# Altium PCB ESE6710 Final Project.PcbDoc
Units mil, origin at the board's own origin, x right, y up, seen from the top; angles counter-clockwise.
Board outline 2951 x 2451 mil, 2 copper layers (Top Layer, Bottom Layer), stack 61.756 mil thick; 34 components, 12 nets, 85 pads, 279 vias.
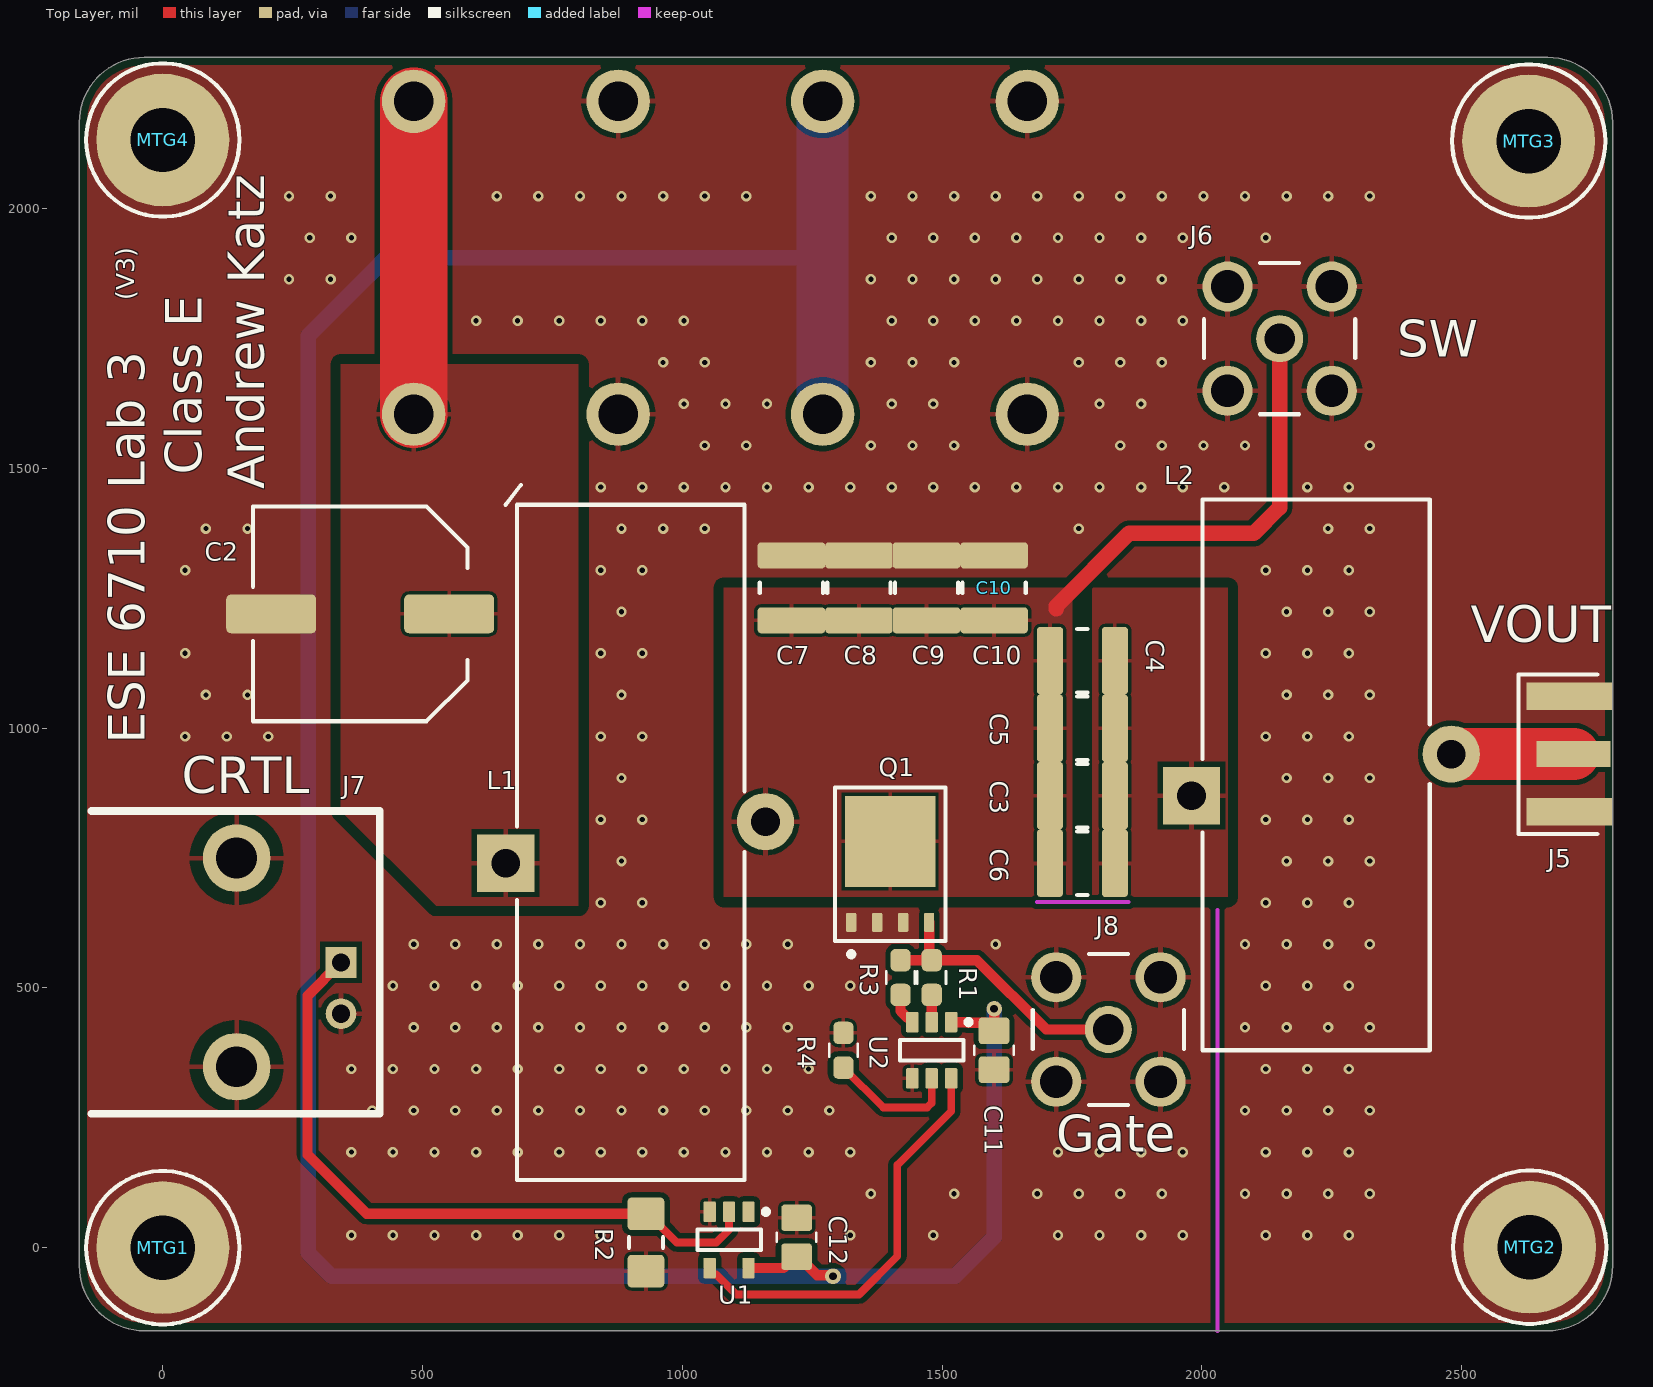
[diagram p0: Top Layer view]
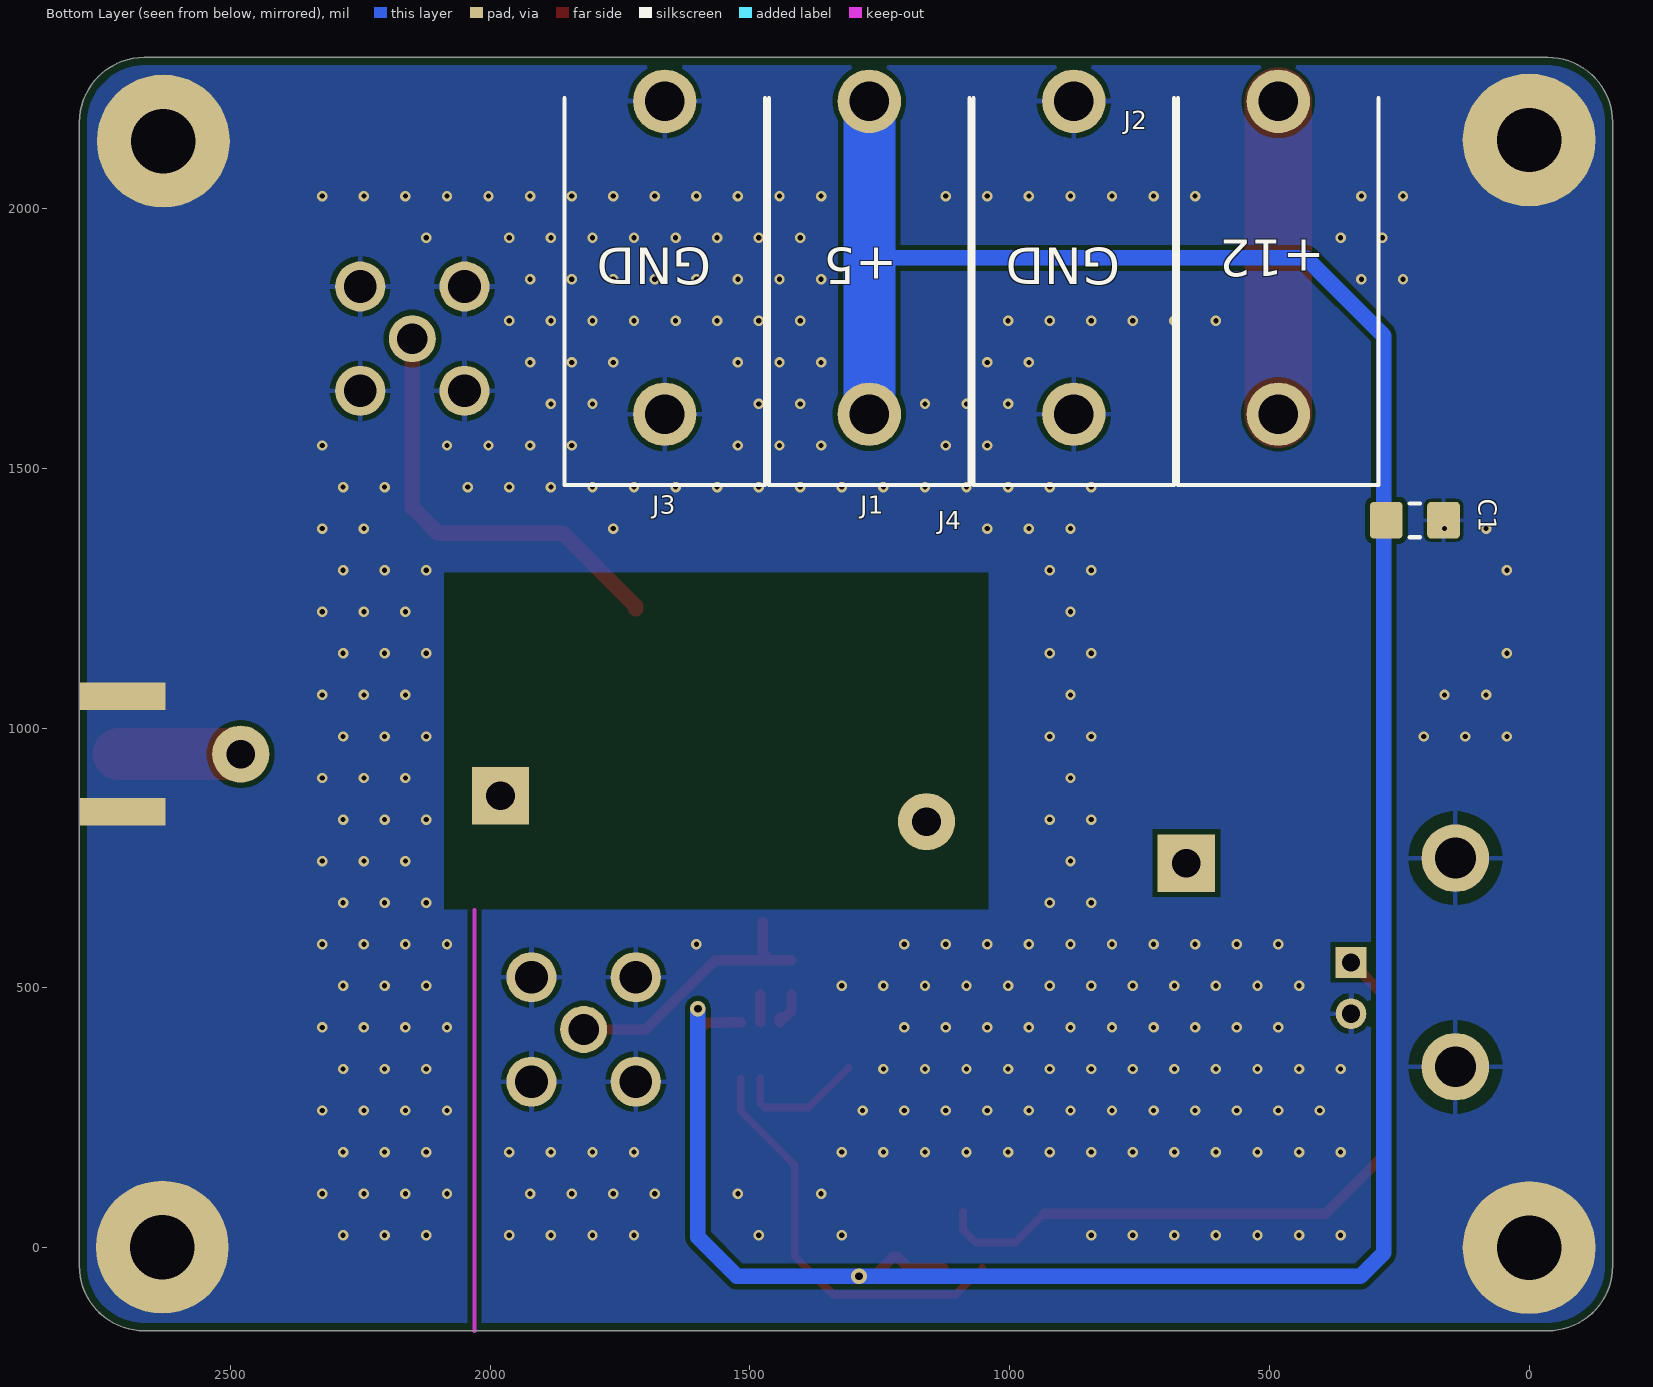
[diagram p1: Bottom Layer view, seen from below]
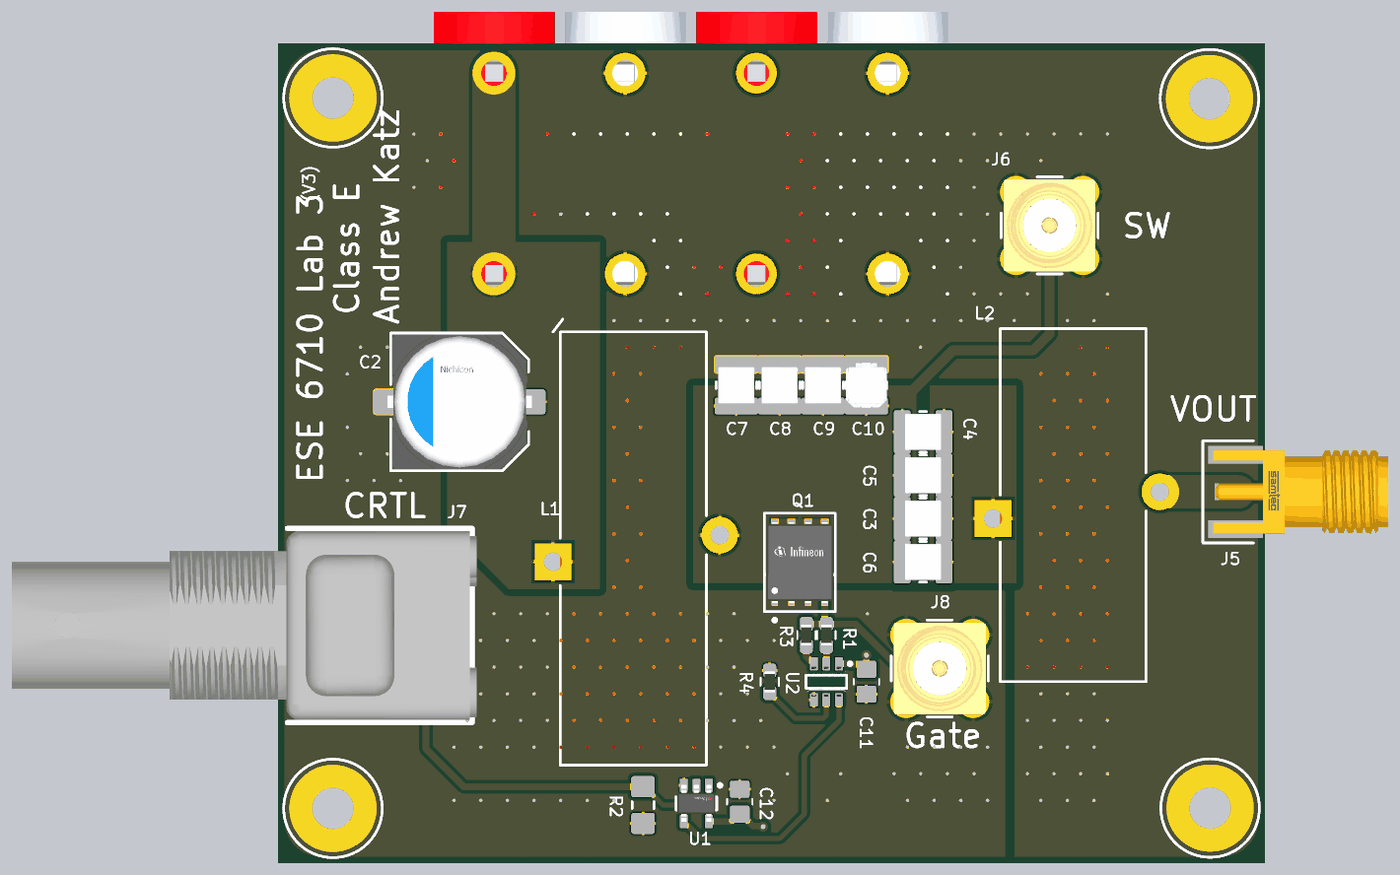
[diagram p2: 3D render of the assembled board from above, using the file's embedded part models]
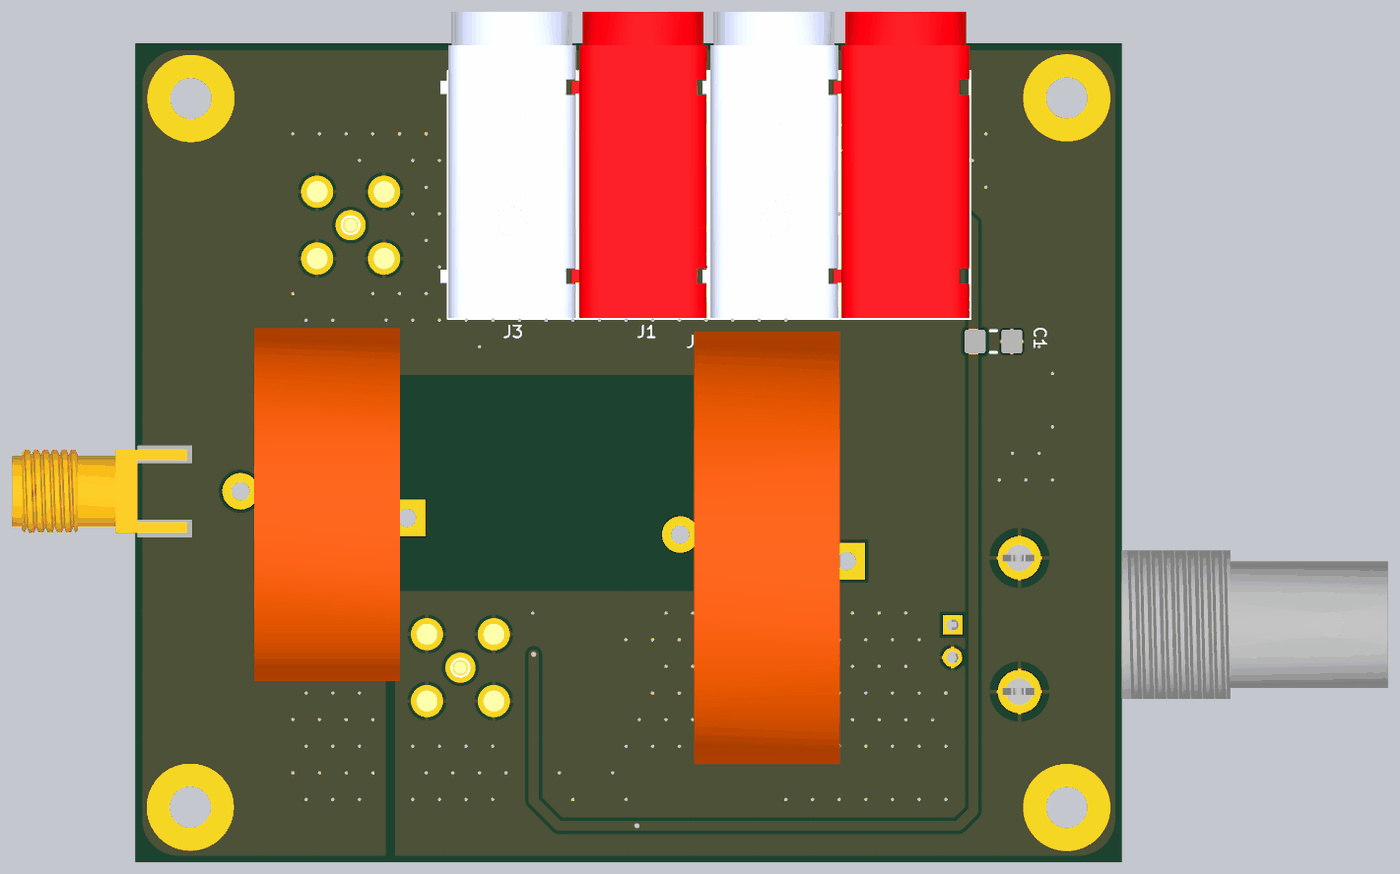
[diagram p3: 3D render of the assembled board from below, using the file's embedded part models]

## Layer stack, top to bottom
Top Solder: solder mask 1, PSR-4000BN, Dk 4.5
Top Layer: signal copper 1.378
Dielectric 1: core 59, Kingboard KB6167F, Dk 4.5
Bottom Layer: signal copper 1.378
Bottom Solder: solder mask 1, PSR-4000BN, Dk 4.5

## Board outline
-160.5,-35 -160.5,2166 cw(c-35.5,2166) -35.5,2291 2665.5,2291 cw(c2665.5,2166) 2790.5,2166 2790.5,-35 cw(c2665.5,-35) 2665.5,-160 -35.5,-160 cw(c-35.5,-35)

## Design rules (kind name [scope] priority, off if disabled: settings)
AcuteAngle [All] p1: minimum=6.00000000000000E+0001 checktracksonly=FALSE
BoardOutlineClearance [Not (OnSilkscreen Or HasFootprint('FP-SMA-J-P-H-ST-EM1-MFG'))] p1: gap=15 ignorepadtopadclearanceinfootprint=FALSE
Clearance [All] p1: gap=10 ignorepadtopadclearanceinfootprint=FALSE except(6: Arc-Text Track-Text SMDPad-Text THPad-Text Via-Text Fill-Text Poly-Text Region-Text Text-Text; 8: Arc-Arc Arc-Track Arc-SMDPad Arc-THPad Track-Track Track-SMDPad Track-THPad SMDPad-SMDPad; 15: THPad-THPad; 20: Via-Via Fill-Fill Fill-Poly Fill-Region Poly-Poly Poly-Region Region-Region; 30: THPad-Via)
ComponentClearance [All] p1: gap=1 collisioncheckmode=3 verticalgap=1 showdistances=FALSE
DiffPairsRouting [All] p1: maxlimit=393.7 minlimit=6 mostfreqgap=8 toplayer_minwidth=6 toplayer_maxwidth=15 toplayer_prefwidth=8 bottomlayer_minwidth=6 bottomlayer_maxwidth=15 bottomlayer_prefwidth=8 maxuncoupledlength=500
Height [All] p1 off: minheight=0 maxheight=1000 prefheight=500
HoleSize SlotSize [(HoleType = 'Slot')] p1: absolutevalues=TRUE maxlimit=265 minlimit=20 maxpercent=80.000 minpercent=20.000
HoleSize [All] p2: absolutevalues=TRUE maxlimit=265 minlimit=10 maxpercent=80.000 minpercent=20.000
HoleToHoleClearance [All] p1: gap=10 allowstackedmicrovias=FALSE
MinimumAnnularRing [All] p1: minimumring=5
MinimumSolderMaskSliver [All] p1: minsoldermaskwidth=0
PlaneClearance [All] p1: clearance=10
PlaneConnect [All] p1: planeconnectstyle=Direct reliefexpansion=16 reliefentries=4 reliefconductorwidth=6 reliefairgap=6
PolygonConnect PolygonConnect_Direct [InPolygonClass('DirConn')] p1: connectstyle=Direct reliefconductorwidth=10 reliefentries=4 polygonreliefangle="90 Angle" airgapwidth=10
PolygonConnect [All] p2: thpad.connectstyle=Relief thpad.reliefconductorwidth=10 thpad.reliefentries=4 thpad.polygonreliefangle="90 Angle" thpad.airgapwidth=10 smdpad.connectstyle=Relief smdpad.reliefconductorwidth=8 smdpad.reliefentries=4 smdpad.polygonreliefangle="90 Angle" smdpad.airgapwidth=6 via.connectstyle=Direct via.reliefconductorwidth=8 via.reliefentries=4 via.polygonreliefangle="90 Angle" via.airgapwidth=6
RoutingCorners [All] p1: cornerstyle=45-Degree minsetback=49.21 maxsetback=49.21
RoutingVias [All] p1: holewidth=15 width=30 viastyle="Through Hole" minholewidth=13 minwidth=27 maxholewidth=100 maxwidth=114
SMDNeckDown [All] p1 off: percent=100.000
SilkToSilkClearance SilkTextToSilk [IsText AND OnSilkscreen] p1: silktosilkclearance=5
SilkToSilkClearance [All] p2: silktosilkclearance=0
SilkToSolderMaskClearance [IsPad] p1: minsilkscreentomaskgap=6 clearancetoexposedcopper=TRUE
SolderMaskExpansion "Tent Vias" [IsVia] p1: expansion=4 istentingtop=TRUE
SolderMaskExpansion [All] p2: expansion=2.95 istentingtop=FALSE
SupplyNets "Schematic Supply Nets_2" [InNet('GND')] p1: voltage=0.000
SupplyNets "Schematic Supply Nets_1" [InNet('+12')] p2: voltage=0.000
SupplyNets "Schematic Supply Nets" [InNet('+5')] p3: voltage=0.000
Width [All] p1: maxlimit=400 minlimit=6 preferedwidth=8
19 further rules are at their usual default settings.

## Classes and differential pairs
polygon class DirConn: LC_L01_P002 SW_L01_P001

## Components (designator, comment, footprint, x,y, rotation, side; value= is the part's Value field where it differs from the comment)
C1 "CAP 1206 10UF 50V 10% X5R" 1206_CAP 220,1400 r180 bottom value=10µF
C2 "PCR1J101MCL1GS" CAPAE_10X12.2_D10.5_NIC 380,1220 r0 top value=100µF
C3 "800B102KT50XT" "CAP_1111_ATC 800B" 1770,870 r0 top value=1nF
C4 "800B1R0BT500XT1K" "CAP_1111_ATC 800B" 1770,1130 r0 top value=1pF
C5 "800B221JT200XT1K" "CAP_1111_ATC 800B" 1770,1000 r0 top value=220pF
C6 "800B1R0BT500XT1K" "CAP_1111_ATC 800B" 1770,740 r0 top value=1pF
C7 "800B221JT200XT1K" "CAP_1111_ATC 800B" 1210,1270 r270 top value=220pF
C8 "800B2R0BT500XT1K" "CAP_1111_ATC 800B" 1340,1270 r270 top value=2pF
C9 "800B2R0BT500XT1K" "CAP_1111_ATC 800B" 1470,1270 r270 top value=2pF
C10 "JR500" JR500-Footprint-1 1600,1270 r90 top
C10 "800B2R0BT500XT1K" "CAP_1111_ATC 800B" 1600,1270 r90 top value=2pF
C11 "CAP 0805 1UF 50V 10% X7R" 0805_CAP 1600,380 r90 top value=1µF
C12 "CAP 0805 0.1UF 50V 10% X7R" 0805_CAP 1220,20 r90 top value=100nF
J1 "571-0500" 571-0500-Footprint-1 1270.18,1905.35 r90 bottom
J2 "571-0500" 571-0500-Footprint-1 482.78,1905.35 r90 bottom
J3 "571-0100" 571-0100-Footprint-1 1663.88,1905.35 r90 bottom
J4 "571-0100" 571-0100-Footprint-1 876.48,1905.35 r90 bottom
J5 "CON-SMA-EDGE-S" FP-SMA-J-P-H-ST-EM1-MFG 2790,950 r90 top value=SMA
J6 "RF2-04A-T-00-50-G" FP-RF2-04A-T-00-50-G-MFG 2149.61,1749.61 r0 top value=SMA
J7 "31-5640-1010" "BNC_RA CON" 343,549 r0 top value=BNC
J8 "RF2-04A-T-00-50-G" FP-RF2-04A-T-00-50-G-MFG 1820,420 r0 top value=SMA
L1 "Custom Inductor, T130-0 Core" "Custom Inductor, T130-0 Core-Footprint-1" 900,780 r90 top value=20µH
L2 "Custom Inductor, T106-0 Core" "Custom Inductor, T106-0 Core-Footprint-1" 2220,910 r90 top value=1.7µH
MTG1 "M3 Screw Hole" "M3 Screw Hole-Footprint-1" 0,0 r0 top locked
MTG2 "M3 Screw Hole" "M3 Screw Hole-Footprint-1" 2631,1 r0 top locked
MTG3 "M3 Screw Hole" "M3 Screw Hole-Footprint-1" 2629,2130 r0 top locked
MTG4 "M3 Screw Hole" "M3 Screw Hole-Footprint-1" 0,2132 r0 top locked
Q1 "BSC065N06LS5ATMA1" IFX-PG-TDSON-8-6-V 1400,740 r90 top
R1 "RES 0603 0 5%" 0603_RES 1480,520 r90 top value=0
R2 "RES 1206 1K 1%" 1206_RES 930,10 r90 top value=1K
R3 "RES 0603 0 5%" 0603_RES 1420,520 r90 top value=0
R4 "RES 0603 0 5%" 0603_RES 1310,380 r270 top value=0
U1 "SN74LVC1G34DBVR" DBV0005A_N 1090,15 r270 top
U2 "LM5114AMF/NOPB" DBV0006A_N 1480,380 r270 top value=310mΩ

## Footprints (in the part's own frame and the unit in brackets; to place one, negate y for a bottom-side part, rotate by r counter-clockwise, add the part's x,y. Pads: shape width x height; smd on the part's side, far side on the other; paste and mask are expansions set on the pad)
571-0100-Footprint-1 [mm]
  round 3.104 hole 1.94 paste-2539.97: 1(-7.65,0) 1(7.65,0)
  silkscreen extent -11.1,-4.9 7.8,4.9, body extent -11.05,-4.84 12.32,5.51, height 12.45
571-0500-Footprint-1 [mm]
  round 3.104 hole 1.94 paste-2539.97: 1(-7.65,0) 1(7.65,0)
  silkscreen extent -11.1,-4.9 7.8,4.9, body extent -11.05,-4.84 12.32,5.51, height 12.45
0603_RES [mil]
  rrect50% 43x39 smd: 1(-33.46,0) 2(33.46,0)
  silkscreen extent -12,-28 12,28, body extent -31,-16 32,16, height 24
0805_CAP [mm]
  rrect25% 1.3x1.5 smd: 1(-0.95,0) 2(0.95,0)
  silkscreen extent -0.21,-0.97 0.21,0.97, body extent -1,-0.65 1,0.66, height 1.52
1206_CAP [mm]
  rrect25% 1.6x1.8 smd: 1(-1.4,0) 2(1.4,0)
  silkscreen extent -0.25,-0.83 0.25,0.83, body extent -1.6,-0.83 1.6,0.83, height 1.91
1206_RES [mm]
  rrect25% 1.6x1.8 smd: 1(-1.4,0) 2(1.4,0)
  silkscreen extent -0.25,-0.83 0.25,0.83, body extent -1.6,-0.83 1.6,0.83, height 1.35
"BNC_RA CON" [mm] "Connector; BNC Elbow"
  rect 1.5x1.5 hole 0.9: 1(0,0)
  round 3.3 hole 2: 2(-5.1,-5.1) 2(-5.1,5.1)
  round 1.5 hole 0.9: 2(0,-2.5)
  silkscreen extent -12.2,-7.4 1.9,7.4, body extent -33.18,-7.2 2.22,7.2, height 15.6
"CAP_1111_ATC 800B" [mil] "Chip Capacitor, 2-Leads, Body 2.92x2.79mm, IPC Medium Density"
  rrect25% 50x129.92 smd: 1(-62.5,0) 2(62.5,0)
  silkscreen extent -10,-61 10,61, body extent -55,-55 55,55, height 70
CAPAE_10X12.2_D10.5_NIC [mm]
  rrect25% 4.4x1.9 smd: 1(4.35,0) 2(-4.35,0)
  silkscreen extent -5.25,-5.25 5.25,5.25, body extent -6.25,-5.5 6.25,5.5, height 0.25
"Custom Inductor, T106-0 Core-Footprint-1" [mil]
  rect 110x110 hole 55: 1(-40,240)
  round 110 hole 55: 2(40,-260)
  silkscreen extent -530,-219 530,219, body extent -530,-219 530,219, height 1090
"Custom Inductor, T130-0 Core-Footprint-1" [mil]
  rect 110x110 hole 55: 1(-40,240)
  round 110 hole 55: 2(40,-260)
  silkscreen extent -650,-220 650,219, body extent -650,-219 650,219, height 1330
DBV0005A_N [mm] "SOT23, 5-Leads, Body 3.05x1.75mm, Pitch 0.95mm, IPC Medium Density"
  rrect17% 1x0.6 smd: 1(-1.375,0.95) 2(-1.375,0) 3(-1.375,-0.95) 4(1.375,-0.95) 5(1.375,0.95)
  silkscreen extent -1.5,-1.55 0.5,1.93, body extent -1.95,-1.78 1.95,1.78, height 0.25
DBV0006A_N [mm] "SOT23, 6-Leads, Body 3.05x1.75mm, Pitch 0.95mm, IPC Medium Density"
  rrect17% 1x0.6 smd: 1(-1.375,0.95) 2(-1.375,0) 3(-1.375,-0.95) 4(1.375,-0.95) 5(1.375,0) 6(1.375,0.95)
  silkscreen extent -1.5,-1.55 0.5,1.93, body extent -1.4,-1.45 1.4,1.45, height 1.45
FP-RF2-04A-T-00-50-G-MFG [mm]
  round 2.3 hole 1.5 paste-2539.97 mask+0: 1(0,0)
  round 2.45 hole 1.6 paste-2539.97 mask+0: 2(-2.55,-2.55) 2(-2.55,2.55) 2(2.55,-2.55) 2(2.55,2.55)
  silkscreen extent -3.7,-3.7 3.7,3.7, body extent -3.5,-3.5 3.5,3.5, height 9.6
FP-SMA-J-P-H-ST-EM1-MFG [mm]
  rect 1.27x3.6 smd paste+0 mask+0: 1(0,1.9)
  rect 1.35x4.2 smd paste+0 mask+0: 2(-2.825,2.1) 2(2.825,2.1)
  rect 1.35x4.2 smd far side paste+0 mask+0: 2(-2.825,2.1) 2(2.825,2.1)
  silkscreen extent -3.9,0.74 3.9,4.59, body extent -3.18,-9.52 3.18,3.81, height 3.81
IFX-PG-TDSON-8-6-V [mm] "PG-TDSON-8-6, SMD, 1.27 mm pitch, 8 pin, 5.90 mm W X 5.075 mm L X 1.20 mm H body"
  rrect25% 0.925x0.5 smd paste-0.05 mask+0: 1(-2.894,1.905) 2(-2.894,0.635) 3(-2.894,-0.635) 4(-2.894,-1.905)
  rect 4.455x4.41 smd paste-2539.97 mask-2539.97: 5-6-7-8(1.066,0)
  silkscreen extent -4.57,-2.7 3.7,2.7, body extent -3.13,-2.7 3.03,2.69, height 1.01
JR500-Footprint-1 [mm]
  rrect25% 1x1.8 smd paste+0 mask+0.102: 1(-1.7,0) 2(1.7,0)
  body extent -1.75,-1.55 1.75,1.55, height 1.15
"M3 Screw Hole-Footprint-1" [mm]
  round 6.5 hole 3.15: 1(0,0)
  silkscreen extent -3.75,-3.75 3.75,3.75

## Part data
C1: library part CMP-001-00003-6, "Capacitor Surface Mount 1206 Footprint 10UF 25V 10% Tolerance Ceramic X5R", Capacitor Type=Ceramic, Case/Package=1206, JLCPCB Part #=C13585, Manufacturer=Various, Tolerance=10%, Voltage=50V, Description in Visual="Cap SMT 1206 10UF 50V 10%  Cer X5R", Manufacturer P/N="CAP 1206 10UF 50V 10% X5R", Mount=SMT, P/N="CAP 1206 10UF 50V 10% X5R", PCB Package=1206, RoHS=Yes, Type="Ceramic X5R"
C2: library part CMP-001-00019-1, "Aluminum Electrolytic Capacitor, Polarized, Aluminum (solid Polymer), 63V, 20% +Tol, 20% -Tol, 100uF, Surface Mount, 4141", Capacitor Type=Aluminium, Case/Package=4141, ESR (Equivalent Series Resistance)=24mR, Leakage Current=189uA, Max Operating Temperature=125°C, Min Operating Temperature=-55°C, Package Shape=Cylindrical, Package Style=SMTMeter, Rated DC Voltage (URdc)=63V, Ripple Current=3A, Tolerance=20%, Dielectric Material=Aluminium, ESR=0.024, Height=12.6mm, JESD-609 Code=e3, Length=11mm, Mount=SMD, Mounting Technology="Surface Mount", Packaging="Tape and Reel", Pins=2, Polarity=Polarized, Reach SVHC Compliant=No, RoHS=Yes, RoHS Compliant=Yes, Tan Delta=0.08, Terminal Finish=Tin, Termination=Flat, Tolerance  (fill in as +-)=20%, Tolerance (fill in as +-)=20%, Voltage=63V, Width=10.3mm
C3: library part CMP-001-00034-1, "Multilayer Ceramic Capacitors MLCC - SMD/SMT 50volts 1000pF 10% NP0", Capacitor Type=Ceramic, Case Code (Imperial)=1111, Case Code (Metric)=2828, Dielectric=C0G, Max Operating Temperature=125°C, Min Operating Temperature=-55°C, Tolerance=10%, Voltage=50V, Case/Package=1111, China RoHS=Compliant, Composition=Ceramic, Dielectric Material=Ceramic, Height=1.78mm, Length=2.79mm, Lifecycle Status=Production, Mount=SMD, Mounting Technology="Surface Mount", Number of Terminals=2, REACH SVHC=Yes, RoHS=Compliant, Termination=SMD/SMT, Thickness=1.778mm, Voltage Rating=50V, Voltage Rating (DC)=50V, Width=2.79mm
C4 C6: library part CMP-001-00029-1, "Ceramic Capacitor, Multilayer, Ceramic, 500V, 50% +Tol, 50% -Tol, C0G, 30ppm/Cel TC, 0.000001uF, Surface Mount, 1111", Capacitor Type=Ceramic, Case/Package=1111, Max Operating Temperature=125°C, Min Operating Temperature=-55°C, Voltage=500V, China RoHS=Compliant, Dielectric Material=Ceramic, Height=1.78mm, Length=2.79mm, Lifecycle Status=Production, Mount=SMD, Mounting Technology="Surface Mount", Number of Terminals=2, REACH SVHC=Yes, RoHS=Compliant, Voltage Rating (DC)=500V, Width=2.79mm
C5 C7: library part CMP-001-00032-1, "Ceramic Capacitor, Multilayer, Ceramic, 200V, 5% +Tol, 5% -Tol, C0G, 30ppm/Cel TC, 0.00022uF, Surface Mount, 1111", Capacitor Type=Ceramic, Case/Package=1111, Max Operating Temperature=125°C, Min Operating Temperature=-55°C, Voltage=200V, China RoHS=Compliant, Dielectric Material=Ceramic, Height=1.78mm, Length=2.79mm, Lifecycle Status=Production, Mount=SMD, Mounting Technology="Surface Mount", Number of Terminals=2, REACH SVHC=Yes, RoHS=Compliant, Voltage Rating (DC)=200V, Width=2.79mm
C8 C9 C10: library part CMP-001-00028-1, "Ceramic Capacitor, Multilayer, Ceramic, 500V, 25% +Tol, 25% -Tol, C0G, 30ppm/Cel TC, 0.000002uF, Surface Mount, 1111", Capacitor Type=Ceramic, Case/Package=1111, Max Operating Temperature=125°C, Min Operating Temperature=-55°C, Voltage=500V, China RoHS=Compliant, Dielectric Material=Ceramic, Height=1.78mm, Length=2.79mm, Lifecycle Status=Production, Mount=SMD, Mounting Technology="Surface Mount", Number of Terminals=2, REACH SVHC=Yes, RoHS=Compliant, Voltage Rating (DC)=500V, Width=2.79mm
C10: library part CMP-001-00035-2, "Ceramic, 125V, 100% +Tol, 0% -Tol, 8pF Min, 50pF Max, Vertical Adjuster, Surface Mount"
C11: library part CMP-011-000490-3, "Capacitor Surface Mount 0805 Footprint 1UF 50V 10% Tolerance Ceramic X7R", JLCPCB Part #=C215803, Manufacturer="Würth Elektronik", PCB Package=0805, Tolerance=10%, Voltage=50V, Description in Visual="Cap SMT 0805 1UF 50V 10% Ceramic X7R", Manufacturer P/N="CAP 0805 1UF 50V 10% X7R", Mount=SMT, P/N="CAP 0805 1UF 50V 10% X7R", Type="Ceramic X7R"
C12: library part CMP-011-000431-5, "Capacitor Surface Mount 0805 Footprint 0.1UF 50V 10% Tolerance Ceramic X7R", Capacitor Type=Ceramic, Case/Package=0805, Manufacturer=Various, Tolerance=10%, Voltage=50V, Description in Visual="Cap SMT 0805 0.1UF 50V 10%  Cer X7R", Manufacturer P/N="CAP 0805 0.1UF 50V 10% X7R", Mount=SMT, P/N="CAP 0805 0.1UF 50V 10% X7R", PCB Package=0805, Pins=2, RoHS=Yes, Type="Ceramic X7R"
J1 J2: library part CMP-000034-4, "Banana Jack, Red"
J3 J4: library part CMP-002-00000-2, "Banana Jack, Black"
J5: library part CMP-00788-1, "Sma Female Connector, Pcb Edge Mount Rohs Compliant: Yes", Case/Package=SMA, Frequency=18GHz, Contact Gender=Female, Contact Material=Gold, Height=6.35mm, Impedance=50Ω, Manufacturer Package Identifier=CON-SMA-EDGE-S, Number of Contacts=1, Number of Ports=1, Pins=1, RoHS=Compliant, Shell Material=Brass
J6 J8: library part CMP-00789-1, "Conn SMA 0Hz to 6GHz 50Ohm Solder ST Thru-Hole F Gold", Dielectric Material=PTFE, Frequency=6GHz, Max Operating Temperature=165°C, Min Operating Temperature=-65°C, Voltage Rating=500V, Contact Material=Gold, Height=10.3378mm, Impedance=50Ω, Lifecycle Status=Production, Number of Contacts=1, REACH SVHC=Yes, RoHS=Compliant, Schedule B=8536695050
J7: library part CMP-039-000000-2, "RF BNC Connector, 1 Contact(s), Female, Panel Mount, Board Mount, Solder Terminal, Guide Pin, Jack", Dielectric Withstanding Voltage (AC)=2.1kV, Insulation Color=White, Insulation Resistance=5GR, Max Operating Temperature=165°C, Min Operating Temperature=-65°C, Operating Frequency-Max=4kHz, Body Depth=1.38inch, Body Diameter=0.466inch, Body/Shell Style=JACK, Characteristic Impedance=50R, Connector Type=BNC, Contact Finish - Mating=GOLD, Contact Finish - Termination=GOLD, Contact Gender=Female, Contact Style=Coax, Coupling Type=Bayonet, DIN Conformance=No, Filter Feature=No, IEC Conformance=No, Insertion Loss=0.2dB, JESD-609 Code=e4, Manufacturer Series=31-5640-1010, Mating Information="MULTIPLE MATING PARTS AVAILABLE", MIL Conformance=No, Mount=Board, Mounting Option 1="GUIDE PIN", Mounting Style="RIGHT ANGLE", Number of Contacts=1, Number of Ports=1, Option="General Purpose", Panel Mount=Yes, Reliability=COMMERCIAL, Shell Finish=Nickel, Shell Material=Zinc, Terminal Length=0.19inch, Termination=Solder, VSWR=1.35
L1: library part CMP-002-000035-1, "Custom T130-0 (Phenolic/\"Air\" toroidal core)"
L2: library part CMP-002-000036-1, "Custom T106-0 (Phenolic/\"Air\" toroidal core)"
MTG1 MTG2 MTG3 MTG4: library part CMP-00028-5, "Close clearance Fit for M3 Screw Hole; PCB Mounting for M3 Screw"
Q1: library part CMP-00790-1, "Transistor, Mosfet, N-channel, 60V, 64A, 6.5 Mohm, Power-transistor", Continuous Drain Current (ID)=15A, Drain to Source Breakdown Voltage=60V, Drain to Source Resistance=6.5mΩ, Gate to Source Voltage (Vgs)=20V, Max Junction Temperature (Tj)=150°C, Max Power Dissipation=46W, Min Operating Temperature=-55°C, Package Quantity=5000, Power Dissipation=2.5W, China RoHS=Non-Compliant, Drain to Source Voltage (Vdss)=60V, Height=1.1mm, Lifecycle Status=Production, Max Operating Temperature=150°C, Min Breakdown Voltage=60V, Number of Channels=1, Number of Elements=1, Number of Terminals=8, On-State Resistance=6.5mΩ, Packaging="Tape & Reel", REACH SVHC=No, RoHS=Compliant, Turn-Off Delay Time=14ns, Turn-On Delay Time=5ns
R1 R3 R4: library part CMP-005-001964-4, "Resistor Surface Mount, 0 Ohms, 0603 Footprint, 5% Tolerance 0.1W", JLCPCB Part #=C21189, Manufacturer=Various, Manufacturer P/N="RES 0603 0R 5%", PCB Package=0603, Power Rating=0.1W, Tolerance=5%, Description in Visual="Res SMT 0 0603  5%  0.1W", Mount=SMT
R2: library part CMP-005-005860-3, "Resistor Surface Mount, 1K Ohms, 1206 Footprint, 1% Tolerance 0.25W", JLCPCB Part #=C4410, Manufacturer=Various, PCB Package=1206, Power Rating=0.25W, Tolerance=1%, Description in Visual="Res SMT 1K 1206  1%  0.25W", Manufacturer P/N="RES 1206 1K 1%", Mount=SMT
U1: library part CMP-00787-1, "1 32mA 1.65V~5.5V 32mA 1 SOT-23-5 Buffer/Driver/Transceiver ROHS", Ambient Temperature Range High=125°C, Case/Package=SOT-23, High Level Output Current=-32mA, Low Level Output Current=32mA, Manufacturer Lifecycle Status=ACTIVE, Max Junction Temperature (Tj)=150°C, Max Supply Voltage=5.5V, Min Operating Temperature=-40°C, Min Supply Voltage=1.5V, Nominal Supply Current=10µA, Quiescent Current=1µA, Contact Plating=Gold, Height=1.45mm, Lead Free="Lead Free", Length=2.9mm, Lifecycle Status=Production, Logic Function="Buffer, Inverting", Max Operating Temperature=125°C, Mounting Technology="Surface Mount", Number of Bits=1, Number of Bits per Element=1, Number of Channels=1, Number of Circuits=1, Number of Elements=1, Number of Gates=1, Number of Input Lines=1, Number of Inputs=1, Number of Output Lines=1, Number of Outputs=1, Packaging="Cut Tape", Pins=5, Polarity=Non-Inverting, Propagation Delay=3.9ns, Radiation Hardening=No, REACH SVHC=No, RoHS=Compliant, Schedule B="8542390000, 8542390000", Thickness=1.2mm, Turn-On Delay Time=9.9ns, Width=1.6mm
U2: library part CMP-00786-2, "7.6-A/1.3-A single channel gate driver with 4-V UVLO and split outputs 6-SOT-23 -40 to 125", Case/Package=SOT-23, Manufacturer Lifecycle Status=ACTIVE, Max Operating Temperature=125°C, Max Output Current=7.6A, Max Supply Voltage=12.6V, Min Operating Temperature=-40°C, Min Supply Voltage=4V, Nominal Supply Current=1.3A, Channel Type=Single, Element Configuration=Single, Fall Time=8ns, Height=0m, Lead Free="Lead Free", Length=2.9mm, Lifecycle Status=Production, Mounting Technology="Surface Mount", Number of Channels=1, Number of Drivers=1, Number of Outputs=2, Output Current=7.6A, Pins=6, Rise Time=3.2ns, RoHS=Compliant, Thickness=1.2mm, Turn-Off Delay Time=36ns, Turn-On Delay Time=36ns, Width=1.6mm

## Via types
v1: diameter 20, hole 10, Top Layer to Bottom Layer, tented both sides, 277 vias
v2: diameter 30, hole 15, Top Layer to Bottom Layer, tented both sides, 2 vias

## Nets (pads, with @x,y where several pads share a name; then routed paths per layer and width w, separated by ;. In a path a pad name is that pad's centre, name@x,y a point inside that pad or via, vN(x,y) a via of type N, cw(c..) or ccw(c..) an arc to the next point about the centre after c; other vN are vias at no path point)
+5: C1.1 C11.2 C12.1 J1.1 U1.5 U2.1 | length 5850.2
  Top Layer w20: U1.5 1194.33,-39.13 1216.06,-17.4 C12.1 1223.94,-17.4 1259.62,-53.09 1288.09,-53.09 v2(1290,-55) ; U2.1 1548.76,434.13 1549.9,432.99 1584.41,432.99 C11.2 v2(1600,460)
  Bottom Layer w30: 1270.18,1905.35 1150,1905.35 430,1905.35 280,1755.35 280,-10 325,-55 v2(1290,-55) 1525,-55 1600,20 v2(1600,460)
  Bottom Layer w100: J1.1@1270.18,1604.17 1270.18,1905.35 ; 1270.18,1905.35 1270.18,2206.53 1270.18,1905.35
+12: C2.1 J2.1 L1.1 | length 602.4
  Top Layer w130: J2.1@482.78,1604.17 J2.1@482.78,2206.53
CRTL: J7.1 R2.2 U1.2 | length 1322.8
  Top Layer w15: R2.2@933.94,65.12 989.06,10 1065.31,10 1090,34.68 U1.2
  Top Layer w20: J7.1 278.63,484.63 278.63,178.84 392.35,65.12 R2.2@933.94,65.12
GATE: J8.1 Q1.4 R1.2 R3.2 | length 521.1
  Top Layer w20: R3.2 1469.5,553.46 1566.54,553.46 1700,420 J8.1 ; R1.2@1469.5,562.65 1475.16,568.31 1475.16,625.92 Q1.4
GND: C1.2 C2.2 C7.1 C8.1 C9.1 C10.2 C11.1 C12.2 J3.1 J4.1 J5.2 J6.2 J7.2 J8.2 MTG1.1 MTG2.1 MTG3.1 MTG4.1 Q1.1 Q1.2 Q1.3 R2.1 R4.1 U1.3 U2.4
  other v1: 363,24 443,24 523,24 603,24 683,24 763,24 843,24 1323,24 1483,24 1723,24 1803,24 1883,24 1963,24 2123,24 2203,24 2283,24 1363,104 1523,104 1683,104 1763,104 1843,104 1923,104 2083,104 2163,104 2243,104 2323,104 363,184 443,184 523,184 603,184 683,184 763,184 843,184 923,184 1003,184 1083,184 1163,184 1243,184 1323,184 1723,184 1803,184 1883,184 1963,184 2123,184 2203,184 2283,184 403,264 483,264 563,264 643,264 723,264 803,264 883,264 963,264 1043,264 1123,264 1203,264 1283,264 2083,264 2163,264 2243,264 2323,264 363,344 443,344 523,344 603,344 683,344 763,344 843,344 923,344 1003,344 1083,344 1163,344 1243,344 2123,344 2203,344 2283,344 483,424 563,424 643,424 723,424 803,424 883,424 963,424 1043,424 1123,424 1203,424 2083,424 2163,424 2243,424 2323,424 443,504 523,504 603,504 683,504 763,504 843,504 923,504 1003,504 1083,504 1163,504 1243,504 1323,504 2123,504 2203,504 2283,504 483,584 563,584 643,584 723,584 803,584 883,584 963,584 1043,584 1123,584 1203,584 1603,584 2083,584 2163,584 2243,584 2323,584 843,664 923,664 2123,664 2203,664 2283,664 883,744 2163,744 2243,744 2323,744 843,824 923,824 2123,824 2203,824 2283,824 883,904 2163,904 2243,904 2323,904 43,984 123,984 203,984 843,984 923,984 2123,984 2203,984 2283,984 83,1064 163,1064 883,1064 2163,1064 2243,1064 2323,1064 43,1144 843,1144 923,1144 2123,1144 2203,1144 2283,1144 883,1224 2163,1224 2243,1224 2323,1224 43,1304 843,1304 923,1304 2123,1304 2203,1304 2283,1304 83,1384 163,1384 883,1384 963,1384 1043,1384 1763,1384 2243,1384 2323,1384 843,1464 923,1464 1003,1464 1083,1464 1163,1464 1243,1464 1323,1464 1403,1464 1483,1464 1563,1464 1643,1464 1723,1464 1803,1464 1883,1464 1963,1464 2043,1464 2203,1464 2283,1464 1043,1544 1123,1544 1363,1544 1443,1544 1523,1544 1843,1544 1923,1544 2003,1544 2083,1544 2323,1544 1003,1624 1083,1624 1163,1624 1403,1624 1483,1624 1803,1624 1883,1624 963,1704 1043,1704 1363,1704 1443,1704 1523,1704 1763,1704 1843,1704 1923,1704 603,1784 683,1784 763,1784 843,1784 923,1784 1003,1784 1403,1784 1483,1784 1563,1784 1643,1784 1723,1784 1803,1784 1883,1784 1963,1784 243,1864 323,1864 1363,1864 1443,1864 1523,1864 1603,1864 1683,1864 1763,1864 1843,1864 1923,1864 283,1944 363,1944 1403,1944 1483,1944 1563,1944 1643,1944 1723,1944 1803,1944 1883,1944 1963,1944 2123,1944 243,2024 323,2024 643,2024 723,2024 803,2024 883,2024 963,2024 1043,2024 1123,2024 1363,2024 1443,2024 1523,2024 1603,2024 1683,2024 1763,2024 1843,2024 1923,2024 2003,2024 2083,2024 2163,2024 2243,2024 2323,2024
INA: U1.4 U2.6 | length 802.4
  Top Layer w15: U1.4 1052.6,-47.01 1056.91,-51.32 1064.78,-51.32 1103.46,-90 1340,-90 1413.72,-16.28 1413.72,158.94 1517.4,262.63 U2.6
INB: R4.2 U2.5 | length 252.4
  Top Layer w15: R4.2 1386.53,270 1471.21,270 1480,278.79 U2.5
LC: C3.2 C4.2 C5.2 C6.2 L2.1
NetR1_1: R1.1 U2.2 | length 52.4
  Top Layer w20: U2.2 R1.1
NetR3_1: R3.1 U2.3 | length 67.1
  Top Layer w20: R3.1 1420,455.53 1431.72,443.82 1440.79,443.82 1442.6,442.01 U2.3
SW: C3.1 C4.1 C5.1 C6.1 C7.2 C8.2 C9.2 C10.1 J6.1 L1.2 Q1.5-6-7-8 | length 838.1
  Top Layer w30: 1720,1230 1720,1235 1860,1375 2100,1375 2149.61,1424.61 J6.1
VOUT: J5.1 L2.2 | length 235.2
  Top Layer w100: L2.2 J5.1
pads on no net: U1.1

## Polygon pours and split planes (outlines as drawn)
+12 on Top Layer "+12_L01_P005" (solid, pour order 5): 343,841.22 526.29,657.94 799.33,657.94 800,657.91 800,1700 343,1700
GND on Top Layer "GND_L01_P009" (solid, remove dead copper, pour order 9): -160.5,-67 -160.5,2199.51 -68.56,2291 2693.5,2291 2790.5,2194 2790.5,-66 2696.5,-160 -67.5,-160
LC on Top Layer "LC_L01_P008" (solid, pour order 8): 1789.21,1270 2050,1270 2050,675 1789.21,675
SW on Top Layer "SW_L01_P007" (solid, remove dead copper, pour order 7): 1080,675 1750,675 1750,1270 1080,1270
GND on Bottom Layer "GND_L02_P010" (solid, remove dead copper, pour order 10): -160.5,-67 -160.5,2199.51 -68.56,2291 2693.5,2291 2790.5,2194 2790.5,-66 2696.5,-160 -67.5,-160

## Keep-outs
Top Layer:
  lines w7.87: 1682.6,665.2 1858.58,665.2
Keep-Out Layer:
  lines w7.87: 2030,-160 2030,650

## Other copper
Bottom Layer:
  pour cut-out: 1040,1300 2088.84,1300 2088.84,650 1040,650

## Silkscreen, mask and mechanical layers (free items; w line width, h text height)
Top Overlay:
  lines w7.87: 660,1430 689.47,1468.34
  text "(V3)" at -55,1823.84 h35 r90
  text "SW" at 2375.51,1715.01 h70
  text "Class E" at 74.99,1488.04 h70 r90
  text "Andrew Katz" at 194.99,1460.24 h70 r90
  text "VOUT" at 2517.69,1165.01 h70
  text "ESE 6710 Lab 3" at -35.01,970 h70 r90
  text "CRTL" at 36.52,875.01 h70
  text "Gate" at 1719.35,185.01 h70
Bottom Overlay:
  text "+12" at 393.47,1940.34 h70 r180
  text "GND" at 787.17,1924.99 h70 r180
  text "+5" at 1216.35,1924.99 h70 r180
  text "GND" at 1574.57,1924.99 h70 r180
Board Outline:
  the board outline again, w10
Mechanical Interface 2:
  circle w0.5: c0,0 r126.64
  lines w0.5: -160.5,-35 ccw(c-35.5,-35) -35.5,-160 2665.5,-160 ccw(c2665.5,-35) 2790.5,-35 2790.5,2166 ccw(c2665.5,2166) 2665.5,2291 -35.5,2291 ccw(c-35.5,2166) -160.5,2166 -160.5,-35
Mechanical Interface 3:
  circle w0.5: c2629,2130 r59.06
  circle w0.5: c1862,2207 r38.19
  circle w0.5: c1468.3,2207 r38.19
  circle w0.5: c2502.63,1646 r19.68
  circle w0.5: c2305.78,1646 r19.68
  circle w0.5: c1862,1604.64 r38.19
  circle w0.5: c1468.3,1604.64 r38.19
  circle w0.5: c876.48,2206.53 r38.19
  circle w0.5: c482.78,2206.53 r38.19
  circle w0.5: c0,2132 r59.06
  circle w0.5: c876.48,1604.17 r38.19
  circle w0.5: c1295.28,1277.67 r31.5
  circle w0.5: c482.78,1604.17 r38.19
  circle w0.5: c2590,667.43 r25.59
  circle w0.5: c2590,470.58 r25.59
  circle w0.5: c2161,281 r31.5
  circle w0.5: c2631,1 r59.06
  circle w0.5: c1994,281 r31.5
  circle w0.5: c1448.82,387.91 r31.5
  circle w0.5: c343,549 r17.52
  circle w0.5: c143,749 r39.57
  circle w0.5: c1286.82,387.91 r31.5
  circle w0.5: c343,449 r17.52
  circle w0.5: c143,349 r39.57
  circle w0.5: c0,0 r59.06
  lines w0.5: -160.5,-67 -160.5,2199.51 -68.56,2291 2693.5,2291 2790.5,2194 2790.5,-66 2696.5,-160 -67.5,-160 -160.5,-67

## Text inside footprints (layer, text, board x,y; h text height)
J1: Designer Notes "Front Flange" at 1550.24,2300.34 h30 r180
J2: Designer Notes "Front Flange" at 762.83,2300.34 h30 r180
J3: Designer Notes "Front Flange" at 1943.94,2300.34 h30 r180
J4: Designer Notes "Front Flange" at 1156.54,2300.34 h30 r180
J5: Designer Notes "Board Edge" at 2849.07,815.36 h35 r90
R1: Librarian Notes "SS 102512, ADDED SILKSCREEN." at 1454,463 h1 r90
R2: Librarian Notes "LOCATION: SURFACEMAUNT2LEADS.PCBLIB" at 888.5,-77.3 h1 r90
R3: Librarian Notes "SS 102512, ADDED SILKSCREEN." at 1394,463 h1 r90
R4: Librarian Notes "SS 102512, ADDED SILKSCREEN." at 1336,437 h1 r270